# EAGLE board PumpSolBoardV2 (EAGLE 6.5.0)
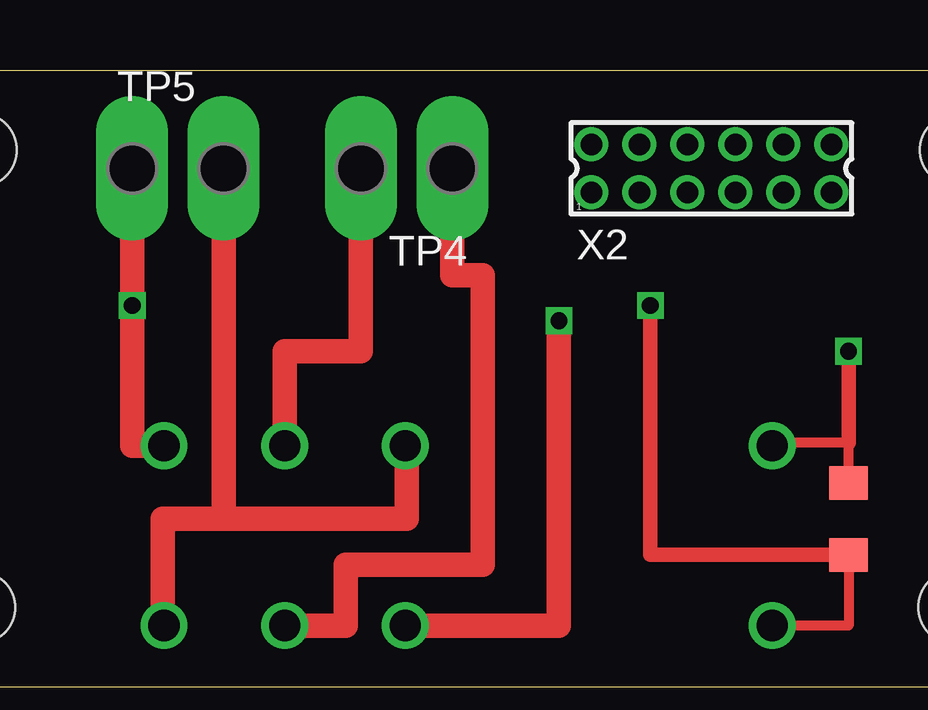
[diagram p0: board, top side]
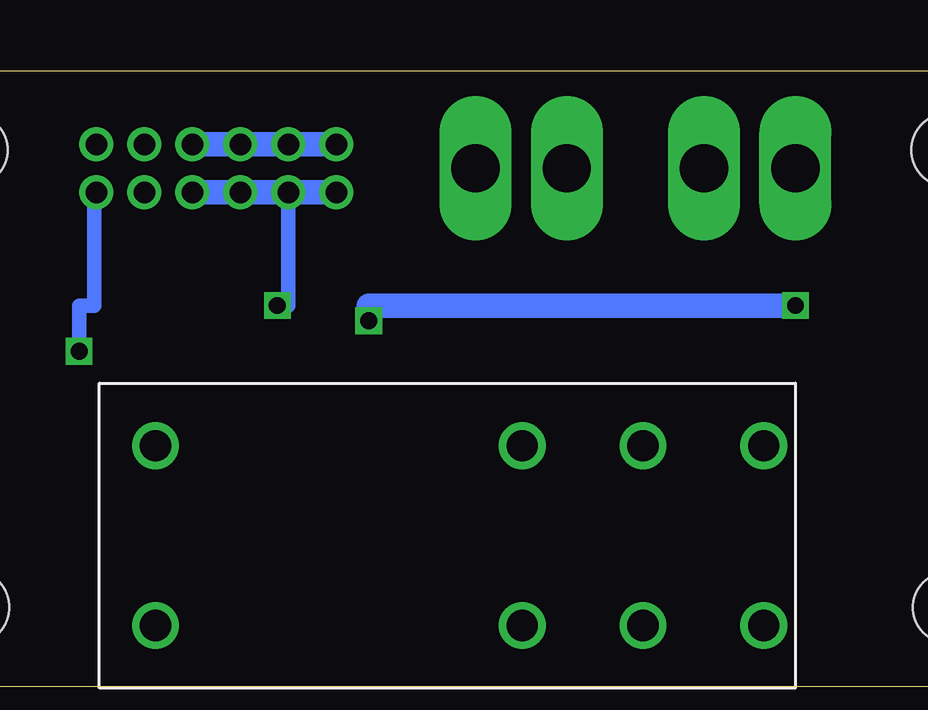
[diagram p1: board, bottom side, seen from below]

No outline drawn. Coordinates in mm, seen from the top.
Copper layers (1*16): Top 0.035mm / dielectric 1.5mm / Bottom 0.035mm
Design rules "default *": minimum track width 10mil, minimum drill 24mil, track to track 10mil, track to pad 10mil, pad to pad 10mil, via to via 10mil, smd to smd 10mil, copper to edge 40mil, drill to drill 10mil, minimum pad ring 10mil, minimum via ring 8mil, stop-mask expansion 4mil, vias tented up to drill 0mil, thermal gap 10mil
Holes 3.05 mm at 43.81,3.3 3.17,22.35
Holes 2.92 mm at 3.17,3.3 43.81,22.35
Milling: 4 lines

## Footprints (pad centres in the part's own frame; a part is rotated, then mirrored left to right if it is on the bottom)
P2-38-20 = drill 2.007 pad 2.54 long: TP-1 -1.905,0; TP-2 1.905,0
RTE = drill 1.3: P$1 0,0; P$2 15.291,0; P$3 20.32,0; P$4 25.349,0; P$5 25.349,7.493; P$6 20.32,7.493; P$7 15.291,7.493; P$8 0,7.493
CD1206 = smd 1.397 x 1.6: A -1.499,0; K 1.499,0
87758-1216 = drill 0.9 pad 1.27: 1 -5,-1; 2 -5,1; 3 -3,-1; 4 -3,1; 5 -1,-1; 6 -1,1; 7 1,-1; 8 1,1; 9 3,-1; 10 3,1; 11 5,-1; 12 5,1

## Placement (x,y rotation side)
TP4  TP2P2-38-20  [P2-38-20]  20.95,21.59 180 top
TP5  TP2P2-38-20  [P2-38-20]  11.43,21.59 0 top
U$1  RTE  [RTE]  36.2,2.54 0 bottom
U$2  CD1206-S01575  [CD1206]  39.37,6.99 270 top
X2  87758-1216  [87758-1216]  33.66,21.59 0 top

## Library data of the parts
TP4 TP5 = testpad
U$1 = relay
U$2 = diode
X2 = con-molex; MPN: 87758-1216; OC_FARNELL: unknown; OC_NEWARK: 25M5671

## Nets
+24V: U$1.P$1 U$2.K X2.1 X2.3 X2.5 X2.7
GND: X2.2 X2.4 X2.6 X2.8
N$5: U$1.P$8 U$2.A X2.11
N$10: TP5.TP-1 U$1.P$2 U$1.P$5
N$11: TP5.TP-2 U$1.P$4 U$1.P$7
N$13: TP4.TP-1 U$1.P$3
N$14: TP4.TP-2 U$1.P$6

## Tracks (layer width: path | path; a pad name or v marks a point on that pad's centre or on a via)
+24V  (via drill 0.7)
  Top 0.406: U$2.K 39.37,2.54 U$1.P$1
  Top 0.61: U$2.K 31.11,5.49 v31.11,15.88
  Bottom 0.61: v31.11,15.88 30.66,15.88 X2.3
  Bottom 1.016: X2.7 X2.5 X2.3 X2.1
GND
  Bottom 1.016: X2.8 X2.6 X2.4 X2.2
N$5  (via drill 0.7)
  Top 0.406: U$2.A 39.37,10.16 36.2,10.16 U$1.P$8
  Top 0.61: v39.37,13.97 39.37,10.16
  Bottom 0.61: X2.11 38.73,20.59 38.73,15.88 39.37,15.88 v39.37,13.97
N$10  (via drill 0.7)
  Top 1.016: U$1.P$2 27.3,2.54 v27.3,15.24 | TP5.TP-1 v9.53,15.88 9.53,10.03 U$1.P$5
  Bottom 1.016: v9.53,15.88 27.3,15.88 v27.3,15.24
N$11
  Top 1.016: U$1.P$7 20.95,10.03 20.95,6.99 13.34,6.99 | 13.34,6.99 TP5.TP-2 | U$1.P$4 10.79,2.54 10.79,6.99 13.34,6.99
N$13
  Top 1.016: U$1.P$3 18.41,2.54 18.41,5.08 24.13,5.08 24.13,17.14 22.86,17.14 TP4.TP-1
N$14
  Top 1.016: U$1.P$6 15.88,13.97 19.05,13.97 TP4.TP-2